# Altium PCB PCB1.PcbDoc
Units mm, origin at the board's own origin, x right, y up, seen from the top; angles counter-clockwise.
Board outline 100 x 100 mm, 2 copper layers (Top Layer, Bottom Layer); 75 components, 80 nets, 260 pads, 0 vias.
Unrouted connection lines stored in the file: 171.
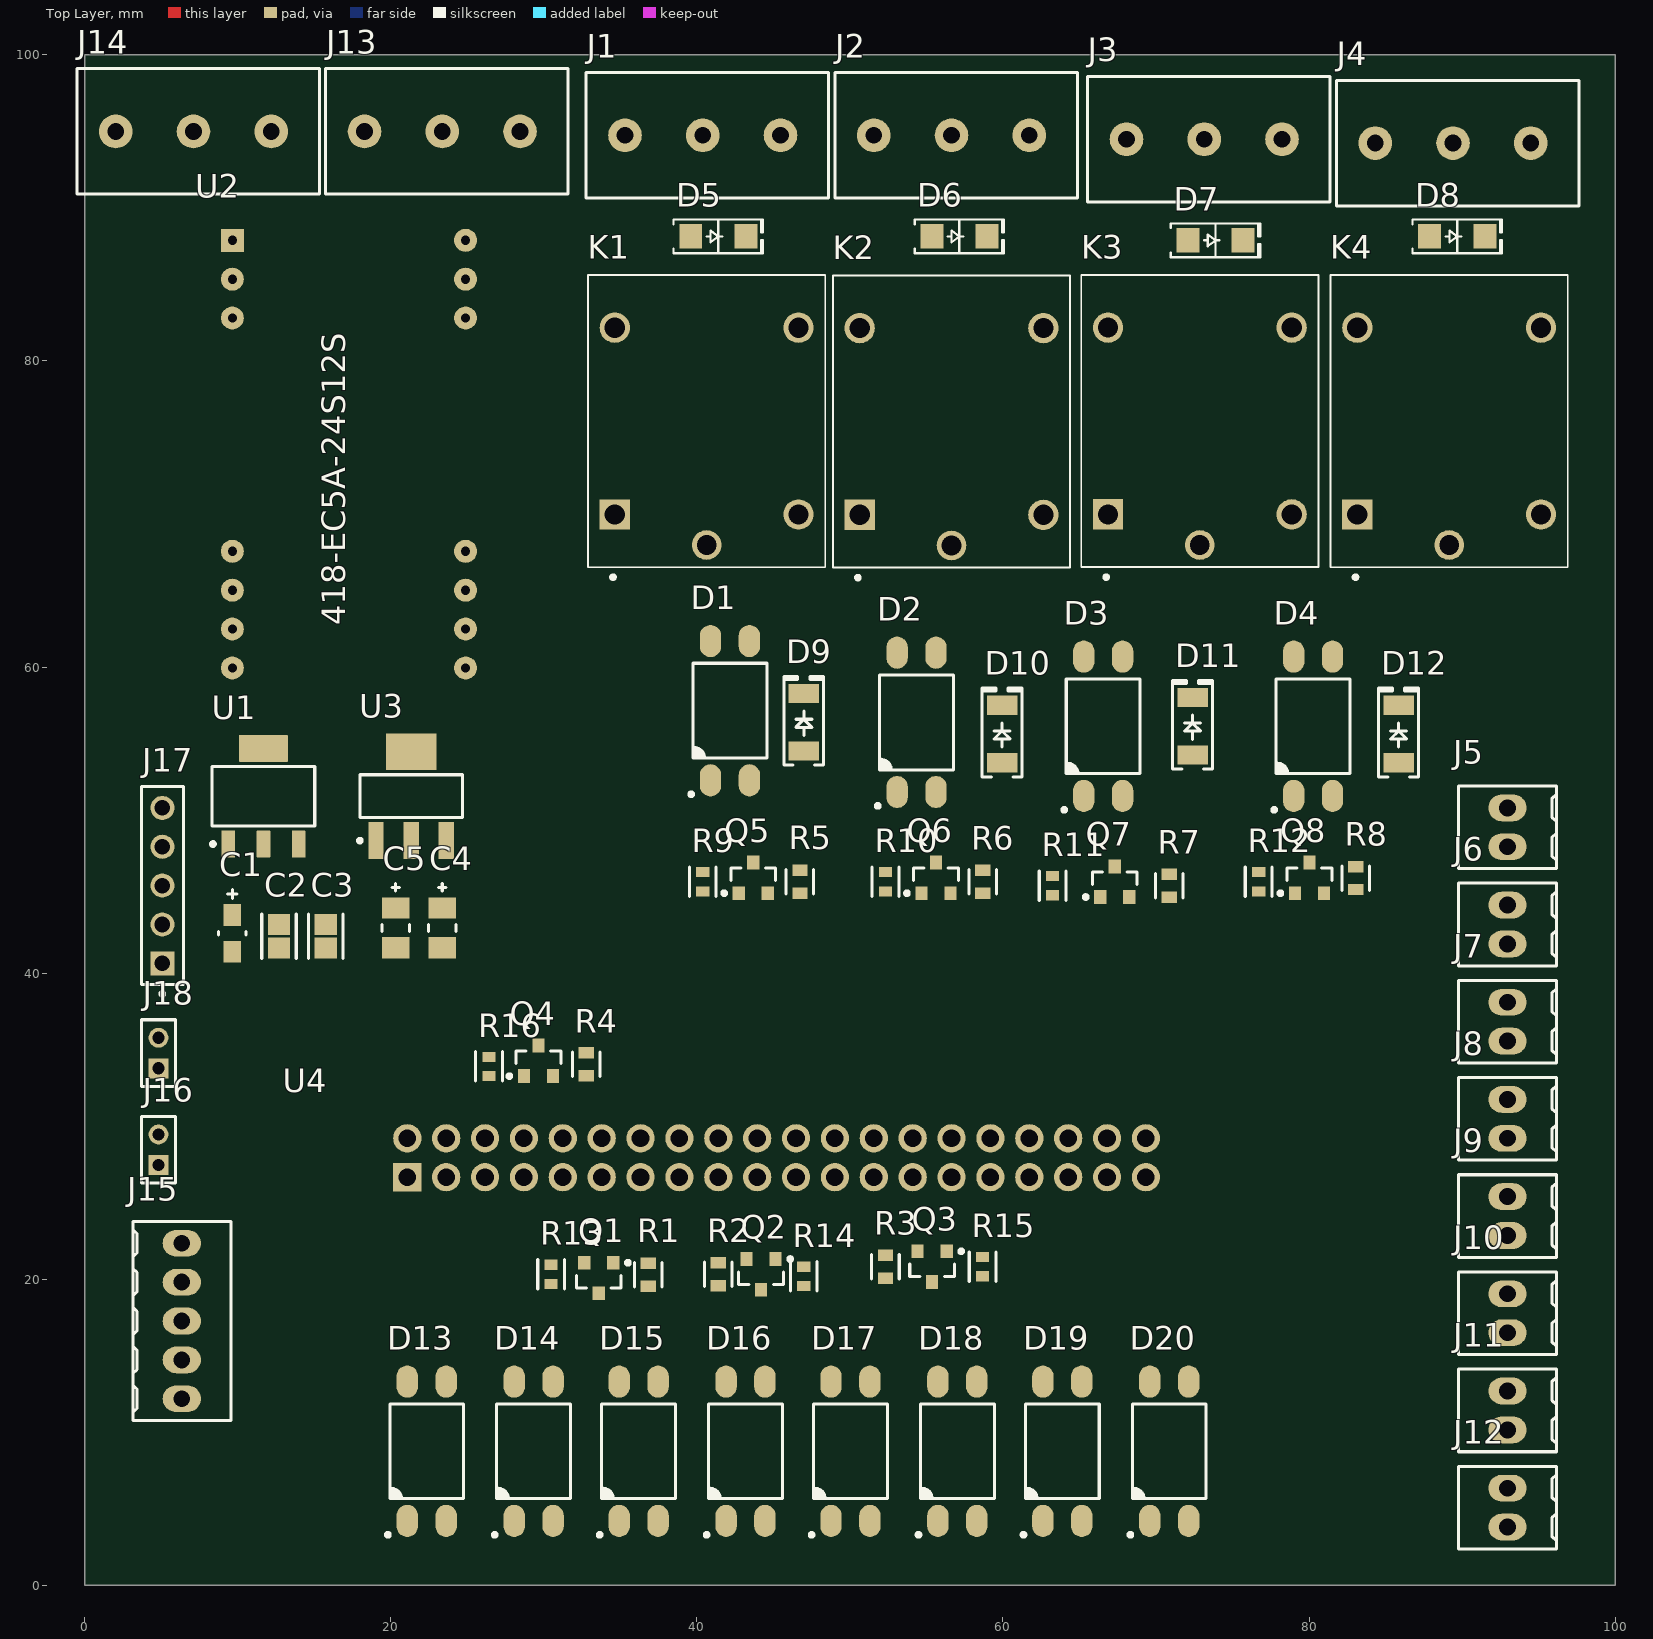
[diagram p0: Top Layer view]
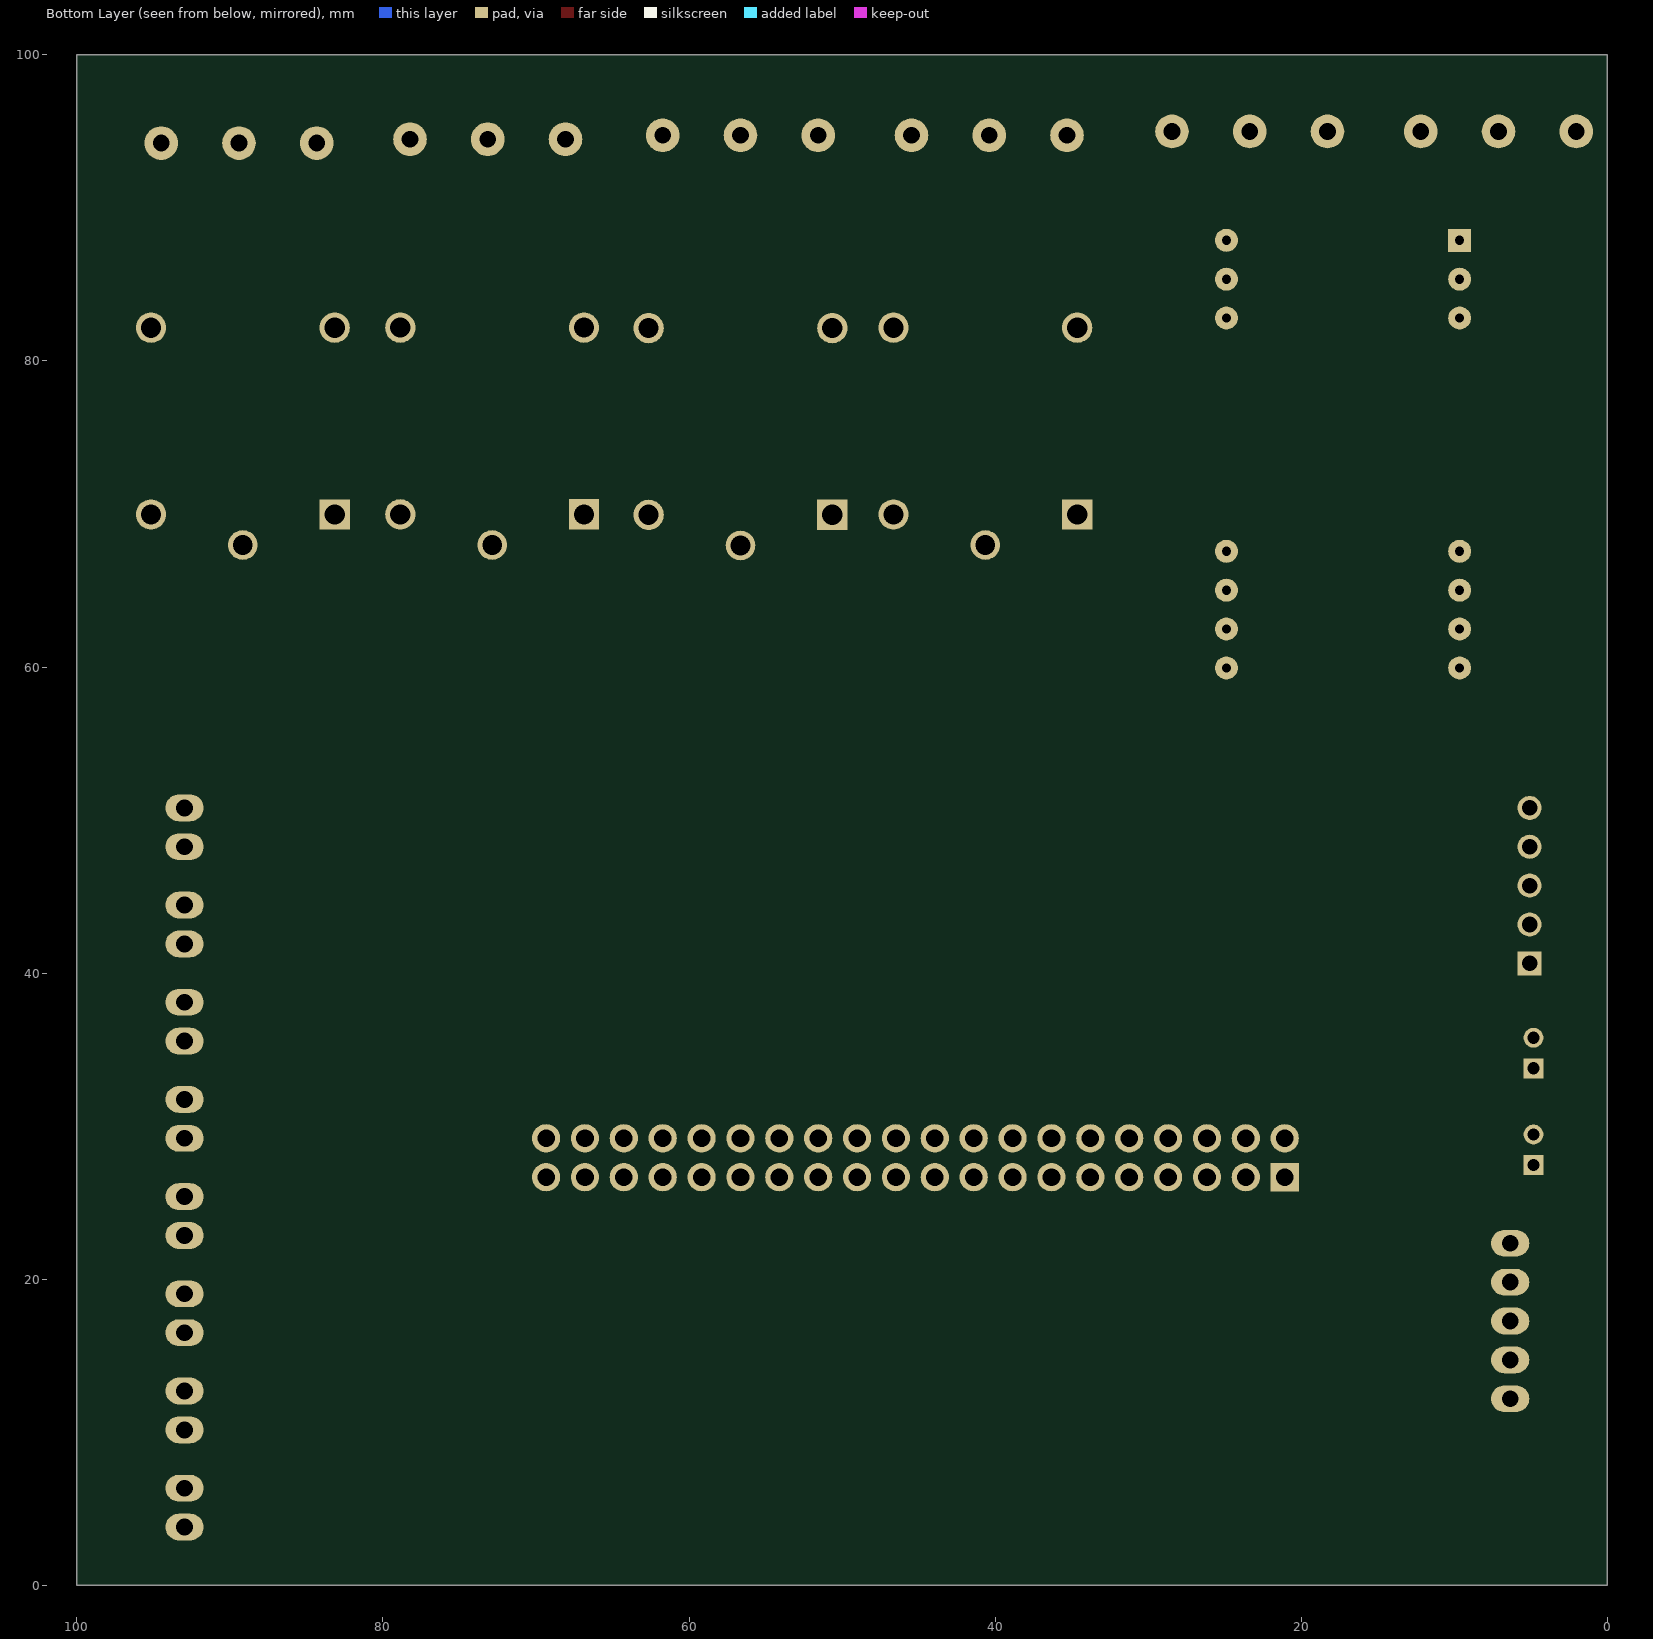
[diagram p1: Bottom Layer view, seen from below]

## Layer stack, top to bottom
Top Solder: solder mask 0.0102, Solder Resist, Dk 3.5
Top Layer: signal copper 0.0356
Dielectric 1: dielectric 0.32, FR-4, Dk 4.8
Bottom Layer: signal copper 0.0356
Bottom Solder: solder mask 0.0102, Solder Resist, Dk 3.5

## Board outline
0,0 0,100 100,100 100,0

## Design rules (kind name [scope] priority, off if disabled: settings)
Clearance [All] p1: gap=0.254 ignorepadtopadclearanceinfootprint=FALSE
PolygonConnect [All] p1: connectstyle=Relief reliefconductorwidth=0.254 reliefentries=4 polygonreliefangle="90 Angle" airgapwidth=0.254
RoutingVias [All] p1: holewidth=0.711 width=1.27 viastyle="Through Hole" minholewidth=0.711 minwidth=1.27 maxholewidth=0.711 maxwidth=1.27
SolderMaskExpansion [All] p1: expansion=0.102 istentingtop=FALSE
SupplyNets "Schematic Supply Nets_4" [InNet('3V3')] p1: voltage=0.000
SupplyNets "Schematic Supply Nets_3" [InNet('+24V')] p2: voltage=0.000
SupplyNets "Schematic Supply Nets_2" [InNet('+5V')] p3: voltage=0.000
SupplyNets "Schematic Supply Nets_1" [InNet('GND')] p4: voltage=0.000
SupplyNets "Schematic Supply Nets" [InNet('+12V')] p5: voltage=0.000
Width [All] p1: maxlimit=0.254 minlimit=0.254 preferedwidth=0.254
30 further rules are at their usual default settings.

## Components (designator, comment, footprint, x,y, rotation, side; value= is the part's Value field where it differs from the comment)
C1 "4.7uF" FP-T491A475M016AT-MFG 9.652,42.602 r90 top
C2 "10uF" FP-C2012-125-0_2-IPC_B 12.7,42.42 r270 top
C3 "10uF" FP-C2012-125-0_2-IPC_B 15.748,42.418 r90 top
C4 "10uF" FP-TAJA-MFG 23.368,42.956 r90 top
C5 "10uF" FP-TAJA-MFG 20.32,42.956 r90 top
D1 "LTV-817S-TA" "LITEON LTV-817" 42.164,57.15 r90 top
D2 "LTV-817S-TA" "LITEON LTV-817" 54.356,56.388 r90 top
D3 "LTV-817S-TA" "LITEON LTV-817" 66.548,56.134 r90 top
D4 "LTV-817S-TA" "LITEON LTV-817" 80.264,56.134 r90 top
D5 "Red" "LED 1206_3216 RED" 41.402,88.138 r0 top
D6 "Red" "LED 1206_3216 RED" 57.15,88.138 r0 top
D7 "Red" "LED 1206_3216 RED" 73.892,87.884 r0 top
D8 "Red" "LED 1206_3216 RED" 89.684,88.138 r0 top
D9 "LL4148" "SOD-80 MiniMELF" 46.99,56.388 r90 top
D10 "LL4148" "SOD-80 MiniMELF" 59.944,55.626 r90 top
D11 "LL4148" "SOD-80 MiniMELF" 72.39,56.134 r90 top
D12 "LL4148" "SOD-80 MiniMELF" 85.852,55.626 r90 top
D13 "LTV-817S-TA" "LITEON LTV-817" 22.352,8.763 r90 top
D14 "LTV-817S-TA" "LITEON LTV-817" 29.337,8.763 r90 top
D15 "LTV-817S-TA" "LITEON LTV-817" 36.195,8.763 r90 top
D16 "LTV-817S-TA" "LITEON LTV-817" 43.18,8.763 r90 top
D17 "LTV-817S-TA" "LITEON LTV-817" 50.038,8.763 r90 top
D18 "LTV-817S-TA" "LITEON LTV-817" 57.023,8.763 r90 top
D19 "LTV-817S-TA" "LITEON LTV-817" 63.881,8.763 r90 top
D20 "LTV-817S-TA" "LITEON LTV-817" 70.866,8.763 r90 top
J1 "282837-3" "TE 282837-3" 40.386,94.742 r0 top
J2 "282837-3" "TE 282837-3" 56.642,94.742 r0 top
J3 "282837-3" "TE 282837-3" 73.152,94.488 r0 top
J4 "282837-3" "TE 282837-3" 89.408,94.234 r0 top
J5 "282834-2" "TE 282834-2" 92.964,49.53 r270 top
J6 "282834-2" "TE 282834-2" 92.964,43.18 r270 top
J7 "282834-2" "TE 282834-2" 92.964,36.83 r270 top
J8 "282834-2" "TE 282834-2" 92.964,30.48 r270 top
J9 "282834-2" "TE 282834-2" 92.964,24.13 r270 top
J10 "282834-2" "TE 282834-2" 92.964,17.78 r270 top
J11 "282834-2" "TE 282834-2" 92.964,11.43 r270 top
J12 "282834-2" "TE 282834-2" 92.964,5.08 r270 top
J13 "282837-3" "TE 282837-3" 23.368,94.996 r0 top
J14 "282837-3" "TE 282837-3" 7.112,94.996 r0 top
J15 "282834-5" "TE 282834-5" 6.35,17.272 r90 top
J16 "M22-2510205" FP-M22-2510205-MFG 4.826,28.464 r90 top
J17 "22-28-4050" FP-22-28-4050-MFG 5.08,45.72 r90 top
J18 "M22-2510205" FP-M22-2510205-MFG 4.826,34.782 r90 top
K1 "SRD-12VDC-SL-C" RELAY_SRD-05VDC-SL-C 40.64,76.073 r90 top
K2 "SRD-12VDC-SL-C" RELAY_SRD-05VDC-SL-C 56.642,76.045 r90 top
K3 "SRD-12VDC-SL-C" RELAY_SRD-05VDC-SL-C 72.867,76.077 r90 top
K4 "SRD-12VDC-SL-C" RELAY_SRD-05VDC-SL-C 89.154,76.073 r90 top
Q1 "SMMBT3904LT1G" ONSC-SOT-23-3-318-08_V 33.594,20.082 r270 top
Q2 "SMMBT3904LT1G" ONSC-SOT-23-3-318-08_V 44.196,20.32 r270 top
Q3 "SMMBT3904LT1G" ONSC-SOT-23-3-318-08_V 55.372,20.828 r270 top
Q4 "SMMBT3904LT1G" ONSC-SOT-23-3-318-08_V 29.652,34.274 r90 top
Q5 "SMMBT3904LT1G" ONSC-SOT-23-3-318-08_V 43.688,46.228 r90 top
Q6 "SMMBT3904LT1G" ONSC-SOT-23-3-318-08_V 55.626,46.228 r90 top
Q7 "SMMBT3904LT1G" ONSC-SOT-23-3-318-08_V 67.31,45.974 r90 top
Q8 "SMMBT3904LT1G" ONSC-SOT-23-3-318-08_V 80.026,46.228 r90 top
R1 "820 Ohm" FP-CRCW0603-HPe3-MFG 36.83,20.308 r270 top
R2 "820 Ohm" FP-CRCW0603-HPe3-MFG 41.402,20.32 r270 top
R3 "820 Ohm" FP-CRCW0603-HPe3-MFG 52.324,20.816 r270 top
R4 "820 Ohm" FP-CRCW0603-HPe3-MFG 32.766,34.036 r90 top
R5 "820 Ohm" FP-CRCW0603-HPe3-MFG 46.736,45.986 r270 top
R6 "820 Ohm" FP-CRCW0603-HPe3-MFG 58.674,45.962 r270 top
R7 "820 Ohm" FP-CRCW0603-HPe3-MFG 70.866,45.72 r270 top
R8 "820 Ohm" FP-CRCW0603-HPe3-MFG 83.058,46.216 r270 top
R9 "1 k" FP-MCT0603-IPC_C 40.386,45.974 r270 top
R10 "1 k" FP-MCT0603-IPC_C 52.324,45.974 r270 top
R11 "1 k" FP-MCT0603-IPC_C 63.246,45.72 r270 top
R12 "1 k" FP-MCT0603-IPC_C 76.708,45.974 r270 top
R13 "1 k" FP-MCT0603-IPC_C 30.48,20.32 r90 top
R14 "1 k" FP-MCT0603-IPC_C 46.99,20.187 r90 top
R15 "1 k" FP-MCT0603-IPC_C 58.674,20.828 r90 top
R16 "1 k" FP-MCT0603-IPC_C 26.416,33.903 r270 top
U1 "TL1963A-33DCYR" DCY0004A_N 11.684,51.562 r90 top
U2 "418-EC5A-24S12S" 418-EC5A-24S12S 9.652,87.884 r0 top
U3 "LM1117MP-5.0" MP04A_N 21.336,51.562 r90 top
U4 "Raspberry pi zero 2W" PCBComponent_1 21.082,26.67 r90 top

## Footprints (in the part's own frame and the unit in brackets; to place one, negate y for a bottom-side part, rotate by r counter-clockwise, add the part's x,y. Pads: shape width x height; smd on the part's side, far side on the other; paste and mask are expansions set on the pad)
418-EC5A-24S12S [mm]
  rect 1.5x1.5 hole 0.6: 1(0,0)
  round 1.5 hole 0.6: 2(0,-2.54) 3(0,-5.08) 9(0,-20.32) 10(0,-22.86) 11(0,-25.4) 12(0,-27.94) 13(15.24,-27.94) 14(15.24,-25.4) 15(15.24,-22.86) 16(15.24,-20.32) 22(15.24,-5.08) 23(15.24,-2.54) 24(15.24,0)
  body extent -2.52,-29.87 17.78,1.93, height 10.2
DCY0004A_N [mm] "SOT223, 4-Leads, Body 6.7x3.7mm, Pitch 2.3mm, IPC Medium Density"
  rrect11% 1.75x0.9 smd: 1(-3.125,2.3) 2(-3.125,0) 3(-3.125,-2.3)
  rrect6% 1.75x3.2 smd: 4(3.125,0)
  silkscreen extent -3.25,-3.35 1.95,3.42, body extent -3.5,-3.25 3.5,3.25, height 1.62
FP-22-28-4050-MFG [mm]
  rect 1.57x1.57 hole 1.02 paste-2539.97 mask+0: 1(-5.08,0)
  round 1.57 hole 1.02 paste-2539.97 mask+0: 2(-2.54,0) 3(0,0) 4(2.54,0) 5(5.08,0)
  silkscreen extent -7.2,-1.37 6.48,1.37, body extent -6.58,-1.47 6.58,1.47, height 0.25
FP-C2012-125-0_2-IPC_B [mm]
  rect 1.378x1.456 smd paste+0 mask+0: 1(-0.764,0) 2(0.764,0)
  silkscreen extent -1.45,-1.13 1.45,1.13, body extent -1.7,-0.98 1.7,0.98, height 0.25
FP-CRCW0603-HPe3-MFG [mm]
  rect 0.75x1 smd paste+0 mask+0: 1(-0.75,0) 2(0.75,0)
  silkscreen extent -0.8,-0.9 0.8,0.9, body extent -1.22,-0.6 1.22,0.6, height 0.25
FP-M22-2510205-MFG [mm]
  rect 1.3x1.3 hole 0.8 paste-2539.97 mask+0: 1(-1,0)
  round 1.3 hole 0.8 paste-2539.97 mask+0: 2(1,0)
  silkscreen extent -2.17,-1.1 2.17,1.1, body extent -2.27,-1.2 2.27,1.2, height 0.25
FP-MCT0603-IPC_C [mm]
  rect 0.664x0.862 smd paste+0 mask+0: 1(-0.629,0) 2(0.629,0)
  silkscreen extent -0.96,-0.87 0.96,0.87, body extent -1.06,-0.58 1.06,0.58, height 0.25
FP-T491A475M016AT-MFG [mm]
  rect 1.42x1.13 smd paste+0 mask+0: 1(-1.2,0) 2(1.2,0)
  silkscreen extent -0.12,-0.9 2.88,0.9, body extent -2.03,-1.02 2.03,1.02, height 0.25
FP-TAJA-MFG [mm]
  rect 1.4x1.8 smd paste+0 mask+0: 1(-1.3,0) 2(1.3,0)
  silkscreen extent -0.23,-0.9 2.9,0.9, body extent -2.1,-1 2.1,1, height 0.25
"LED 1206_3216 RED" [mm] "Chip Diode, 2-Leads, Body 3.13x1.55mm, IPC Medium Density"
  rect 1.5x1.6 smd: 1(-1.8,0) 2(1.8,0)
  silkscreen extent -2.92,-1.1 2.92,1.1, body extent -1.6,-0.8 1.6,0.8, height 0.9
"LITEON LTV-817" [mm] "SOP, 4-Leads, Body 4.60x6.50mm, Pitch 2.54mm, IPC Medium Density"
  oval 2.1x1.4 smd: 1(-4.55,1.27) 2(-4.55,-1.27) 3(4.55,-1.27) 4(4.55,1.27)
  silkscreen extent -5.59,-2.41 3.1,2.66, body extent -5.1,-2.3 5.1,2.3, height 3.85
MP04A_N [mm] "SOT223, 4-Leads, Body 6.5x3.5mm, Pitch 2.3mm, Lead Span 7mm, IPC Medium Density"
  rect 2.4x1 smd: 1(-2.9,2.3) 2(-2.9,0) 3(-2.9,-2.3)
  rect 2.4x3.3 smd: 4(2.9,0)
  silkscreen extent -3.02,-3.35 1.4,3.47, body extent -1.86,-3.35 1.86,3.35, height 1.8
ONSC-SOT-23-3-318-08_V [mm] "SOT23, 3-Leads, Body 2.92x1.3mm, Pitch 0.95mm"
  rect 0.9x0.8 smd: 1(-1,0.95) 2(-1,-0.95) 3(1,0)
  silkscreen extent -1.12,-1.46 0.65,2.03, body extent -0.65,-1.46 0.65,1.46, height 1.11
PCBComponent_1 [mm]
  rect 1.85x1.85 hole 1.15: 1(0,0)
  round 1.85 hole 1.15: 2(2.54,0) 3(0,-2.54) 4(2.54,-2.54) 5(0,-5.08) 6(2.54,-5.08) 7(0,-7.62) 8(2.54,-7.62) 9(0,-10.16) 10(2.54,-10.16) 11(0,-12.7) 12(2.54,-12.7) 13(0,-15.24) 14(2.54,-15.24) 15(0,-17.78) 16(2.54,-17.78) 17(0,-20.32) 18(2.54,-20.32) 19(0,-22.86) 20(2.54,-22.86) 21(0,-25.4) 22(2.54,-25.4) 23(0,-27.94) 24(2.54,-27.94) 25(0,-30.48) 26(2.54,-30.48) 27(0,-33.02) 28(2.54,-33.02) 29(0,-35.56) 30(2.54,-35.56) 31(0,-38.1) 32(2.54,-38.1) 33(0,-40.64) 34(2.54,-40.64) 35(0,-43.18) 36(2.54,-43.18) 37(0,-45.72) 38(2.54,-45.72) 39(0,-48.26) 40(2.54,-48.26)
  body extent -25.82,-56.63 4.78,8.37, height 15.65
RELAY_SRD-05VDC-SL-C [mm]
  rect 1.98x1.98 / inner round 1.98 / far side rect 1.98x1.98 hole 1.32: A1(-6.1,6)
  round 1.98 hole 1.32: A2(-6.1,-6) NC(6.1,6) NO(6.1,-6)
  round 1.935 hole 1.29: COM(-8.1,0)
  silkscreen extent -10.3,-7.75 9.55,7.75, body extent -9.6,-7.8 9.6,7.8, height 15.8
"SOD-80 MiniMELF" [mm] "Molded Diode, 2-Leads, Body 3.40x1.50mm, IPC Medium Density"
  rect 1.25x2 smd: 1(-1.875,0) 2(1.875,0)
  silkscreen extent -2.8,-1.3 2.99,1.3, body extent -1.7,-0.75 1.7,0.75, height 1.5
"TE 282834-2" [mm]
  oval 1.75x2.5 hole 1.1: 1(-1.27,0) 2(1.27,0)
  silkscreen extent -2.7,-3.2 2.7,3.2, body extent -2.77,-3.25 2.77,3.25, height 10
"TE 282834-5" [mm]
  oval 1.75x2.5 hole 1.1: 1(-5.08,0) 2(-2.54,0) 3(0,0) 4(2.54,0) 5(5.08,0)
  silkscreen extent -6.51,-3.2 6.51,3.2, body extent -6.58,-3.25 6.58,3.25, height 10
"TE 282837-3" [mm] "Wire to Board Terminal Block Horizontal with Board, 3 Postions, Body 15.84x8.2mm, Pitch 5.08mm"
  round 2.2 hole 1.1: 1(-5.08,0) 2(0,0) 3(5.08,0)
  silkscreen extent -7.62,-4.1 8.22,4.1, body extent -7.62,-4.1 8.22,4.1, height 10.3

## Part data
C1: library part CMP-03017-000026-1, "T491A475M016AT CAP TANT 4.7UF 20% 16V 1206", Case Code (Imperial)=1206, Case Code (Metric)=3216, ESR (Equivalent Series Resistance)=4R, Leakage Current=800nA, Max Operating Temperature=125°C, Min Operating Temperature=-55°C, Package Quantity=2000, Ripple Current=137mA, Tolerance=20%, Voltage Rating=16V, Capacitance=4.7uF, Case/Package=1206, Construction=Flat, Depth=1.6mm, Dissipation Factor=6%, Features="General Purpose", Height=1.8mm, Height - Seated (Max)=0.071inch, Lead Free="Lead Free", Length=3.2mm, Life (Hours)=2000Hour, Mount="Surface Mount", Number of Pins=2, Packaging="Tape and Reel", Polarity=Polar, Radiation Hardening=No, REACH SVHC="No SVHC", RoHS Compliant=Yes, Series=T491, Termination=SMD/SMT, Voltage Rating (DC)=16V, Width=0.063inch
C2 C3: library part CMP-08246-002675-1, "C2012X5R1E106K125AB Multilayer Ceramic Capacitors 10μF ±10% 25V X5R SMD 0805", Case Code (Imperial)=0805, Case Code (Metric)=2012, Dielectric=X5R, Dielectric Material=Ceramic, Max Operating Temperature=85°C, Min Operating Temperature=-55°C, Package Quantity=1, Tolerance=10%, Voltage=25V, Capacitance=10uF, Case/Package=0805, Depth=1.25mm, Height=1.25mm, Lead Free="Lead Free", Length=2mm, Mount="Surface Mount", Packaging="Tape and Reel", REACH SVHC="No SVHC", Resistor Type=Ceramic, Series=C, Termination=SMD/SMT, Thickness=0.057inch, Voltage Rating=25V, Voltage Rating (DC)=25V, Weight=0.000194oz, Width=0.049inch
C4 C5: library part CMP-2000-07219-2, "TAJA106M010RNJ 10uF 10V  ±20% 3Ω 1206  SMD Tantalum Capacitor", Case Code (Imperial)=1206, Case Code (Metric)=3216, Dielectric Material=Tantalum, ESR (Equivalent Series Resistance)=3R, Leakage Current=1uA, Max Operating Temperature=125°C, Min Operating Temperature=-55°C, Package Quantity=1, Tolerance=20%, Voltage=10V, Capacitance=10uF, Case/Package=1206, Construction=Flat, Depth=1.6mm, Dissipation Factor=6%, Features="General Purpose", Height=1.6mm, Height - Seated (Max)=0.071inch, Lead Free="Lead Free", Lead Pitch=1.1mm, Length=3.2mm, Mount="Surface Mount", Number of Pins=2, Packaging="Tape and Reel", Polarity=Polar, Radiation Hardening=No, REACH SVHC="No SVHC", RoHS Compliant=Yes, Series=TAJ, Termination=SMD/SMT, Voltage Rating=10V, Voltage Rating (DC)=10V, Width=0.063inch
D1 D2 D3 D4 D13 D14 D15 D16 D17 D18 D19 D20: "OPTOISOLATR 5KV TRANSISTOR 4-SMD", Current - DC Forward (If) (Max)=50mA, Current Transfer Ratio (Max)="600% @ 5mA", Current Transfer Ratio (Min)="50% @ 5mA", Device Package="4-SMD, Gull Wing", Manufacturer="Lite-On Inc.", Operating Temperature="-30°C ~ 110°C", Supplier Device Package=4-SMD, Supplier Part Number 1=160-2038-1-ND, Voltage - Forward (Vf) (Typ)=1.2V, Voltage - Isolation=5000Vrms, Voltage - Output (Max)=35V, ComponentLink1Description=Datasheet, ComponentLink1URL=http://optoelectronics.liteon.com/upload/download/DS-70-96-0016/LTV-8X7%20series%20201610%20.pdf, ComponentLink2Description="DigiKey Link", ComponentLink2URL=http://digikey.com/product-detail/en/lite-on-inc/LTV-817S-TA/160-2038-1-ND/3711420, Current - Output / Channel=50mA, Input Type=DC, LastUpdated="12/01/2020 21:59:02", Lifecycle Status=Active, Minimum Order=1, Mounting Type="Surface Mount", Number of Channels=1, Output Type=Transistor, Package / Case="4-SMD, Gull Wing", Packaging=TapeAndReel, Part Number=LTV-817S-TA, Part Status=Active, Price=0.12, Rise / Fall Time (Typ)="4µs, 3µs", Series=-, Supplier 1=DigiKey, Vce Saturation (Max)=200mV
D5 D6 D7 D8: library part LTST-C150KAKT, "LED RED CLEAR SMD", Current - Test=20mA, Device Package="1206 (3216 Metric)", Lens Color=Colorless, Manufacturer="Lite-On Inc.", Millicandela Rating=55mcd, Supplier Part Number 1=160-1402-1-ND, Voltage - Forward (Vf) (Typ)=2V, Color=Red, ComponentLink1Description=Datasheet, ComponentLink1URL=//media.digikey.com/pdf/Data%20Sheets/Lite-On%20PDFs/LTST-C150KAKT.pdf, ComponentLink2Description="DigiKey Link", ComponentLink2URL=http://digikey.com/product-detail/en/lite-on-inc/LTST-C150KAKT/160-1402-1-ND/386755, Configuration=Standard, Height (Max)=1.10mm, LastUpdated="03/06/2024 20:00:41", Lens Size="2.06mm x 1.60mm", Lens Style="Rectangle with Flat Top", Lens Transparency=Clear, Lifecycle Status=Active, Minimum Order=1, Mounting Type="Surface Mount", Package / Case="1206 (3216 Metric)", Packaging=TapeAndReel, Part Number=LTST-C150KAKT, Part Status=Active, PartId=189, Price=0.07, Series=-, Size / Dimension="3.20mm L x 1.60mm W", Supplier 1=DigiKey, Viewing Angle=130°, Wavelength - Dominant=615nm, Wavelength - Peak=621nm
D9 D10 D11 D12: "DIODE GEN PURP 100V 200MA SOD80", Current - Average Rectified (Io)=200mA, Current - Reverse Leakage @ Vr="25nA @ 20V", Manufacturer="ON Semiconductor", Operating Temperature - Junction="-55°C ~ 175°C", Package / Case="DO-213AC, MINI-MELF, SOD-80", Supplier Device Package=SOD-80, Supplier Part Number 1=LL4148FSCT-ND, Voltage - DC Reverse (Vr) (Max)=100V, Voltage - Forward (Vf) (Max) @ If="1V @ 10mA", ComponentLink1Description=Datasheet, ComponentLink1URL=https://www.onsemi.com/pub/Collateral/LL4148-D.pdf, ComponentLink2Description="DigiKey Link", ComponentLink2URL=http://digikey.com/product-detail/en/on-semiconductor/LL4148/LL4148FSCT-ND/1923118, Diode Type=Standard, LastUpdated="03/06/2024 20:05:39", Lifecycle Status=Active, Minimum Order=1, Mounting Type="Surface Mount", Packaging=TapeAndReel, Part Number=LL4148, Part Status=Active, PartId=2621, Price=0.02, Reverse Recovery Time (trr)=4ns, Series=-, Speed="Small Signal =< 200mA (Io), Any Speed", Supplier 1=DigiKey
J1 J2 J3 J4 J13 J14: "TERM BLK 3P SIDE ENT 5.08MM PCB", Color=Green, Current="13.5 A", Manufacturer="TE Connectivity AMP Connectors", Supplier Part Number 1=A113321-ND, Voltage="300 V", ComponentLink1Description=Datasheet, ComponentLink1URL=https://www.te.com/commerce/DocumentDelivery/DDEController?Action=srchrtrv&DocNm=282837&DocType=Customer+Drawing&DocLang=English, ComponentLink2Description="DigiKey Link", ComponentLink2URL=https://www.digikey.com/en/products/detail/te-connectivity-amp-connectors/282837-3/2187974, Features="Interlocking (Side)", LastUpdated="21/06/2022 15:00:39", Lifecycle Status=Active, Mating Orientation="Horizontal with Board", Minimum Order=1, Mounting Type="Through Hole", Number of Levels=1, Packaging=Tray, Part Number=282837-3, Part Status=Active, Pitch="0.200\" (5.08mm)", Positions Per Level=3, Price=0.47, Series=Buchanan, Supplier 1=DigiKey, Wire Gauge="16-28 AWG", Wire Termination="Screw - Rising Cage Clamp"
J5 J6 J7 J8 J9 J10 J11 J12: "TERM BLK 2P SIDE ENT 2.54MM PCB", Color=Green, Current=10A, Manufacturer="TE Connectivity AMP Connectors", Supplier Part Number 1=A98333-ND, Voltage=150V, ComponentLink1Description=Datasheet, ComponentLink1URL=https://www.te.com/commerce/DocumentDelivery/DDEController?Action=srchrtrv&DocNm=282834&DocType=Customer+Drawing&DocLang=English, ComponentLink2Description="DigiKey Link", ComponentLink2URL=http://digikey.com/product-detail/en/te-connectivity-amp-connectors/282834-2/A98333-ND/1150135, LastUpdated="15/01/2020 4:15:38", Lifecycle Status=Active, Mating Orientation="Horizontal with Board", Minimum Order=1, Mounting Type="Through Hole", Number of Levels=1, Packaging=Bulk, Part Number=282834-2, Part Status=Active, Pitch="0.100\" (2.54mm)", Positions Per Level=2, Price=0.88, Series=Buchanan, Supplier 1=DigiKey, Wire Gauge="16-30 AWG", Wire Termination="Screw - Rising Cage Clamp"
J15: "TERM BLK 5P SIDE ENT 2.54MM PCB", Color=Green, Current=10A, Manufacturer="TE Connectivity AMP Connectors", Supplier Part Number 1=A98336-ND, Voltage=150V, ComponentLink1Description=Datasheet, ComponentLink1URL=https://www.te.com/commerce/DocumentDelivery/DDEController?Action=srchrtrv&DocNm=282834&DocType=Customer+Drawing&DocLang=English, ComponentLink2Description="DigiKey Link", ComponentLink2URL=http://digikey.com/product-detail/en/te-connectivity-amp-connectors/282834-5/A98336-ND/1153266, LastUpdated="15/01/2020 4:16:19", Lifecycle Status=Active, Mating Orientation="Horizontal with Board", Minimum Order=1, Mounting Type="Through Hole", Number of Levels=1, Packaging=Bulk, Part Number=282834-5, Part Status=Active, Pitch="0.100\" (2.54mm)", Positions Per Level=5, Price=2.99, Series=Buchanan, Supplier 1=DigiKey, Wire Gauge="16-30 AWG", Wire Termination="Screw - Rising Cage Clamp"
J16 J18: library part CMP-15831-000005-1, "CONN HEADER VERT 2POS 2MM", Current Rating=2A, Manufacturer=Harwin, Package=0, Temperature="-40°C to +105°C", Temperature Range High=+105°C, Temperature Range Low=-40°C, Automotive=No, Category=Conn, ComponentLink2Description=Datasheet, ComponentLink2URL=https://cdn.harwin.com/pdfs/C018XX_M22_Series_Connectors.pdf, Conn Gender=Male, Conn Orientation=Vertical, Contact Material=Gold,Nickel, Device Class L1=Connectors, Device Class L2="Headers and Wire Housings", Device Class L3=unset, Digikey Description="CONN HEADER VERT 2POS 2MM", Footprint Url=https://cdn.harwin.com/pdfs/M22-251.pdf, Height=5.45mm, Lead Free=Yes, Manufacturer Part Number=M22-2510205, Mouser Description="Headers & Wire Housings 2 PIN SIL VERTICAL GOLD PIN HEADER", Number Of Contacts=2, Number Of Rows=1, Octopart=https://octopart.com/m22-2510205-harwin-2538221, Pitch=2mm, RoHS=TRUE
J17: library part CMP-00257-00278173-1, "22-28-4050 KK® 254 Breakaway Header, Vertical, 5 Circuits, Tin (Sn) Plating, Mating Pin Length 6.09mm", Color=Black, Contact Resistance=20mΩ, Current Rating=4A, Flammability Rating="UL94 V-0", Max Operating Temperature=75°C, Max Voltage Rating (DC)=250.25kV, Min Operating Temperature=0°C, Voltage Rating=250V, Connector Type="Male Pin", Contact Material=Brass, Contact Mating Length=6.096mm, Contact Plating=Tin, Gender=Male, Glow Wire Compliant=Non-compliant, Height=2.29mm, Housing Color=Black, Housing Material=Thermoplastic, Lead Free="Lead Free", Lead Pitch=2.54mm, Length=12.7mm, Mount="Through Hole", NexarPartId=278173, Number of Circuits=5, Number Of Contacts=5, Number of Positions=5, Number Of Rows=1, Orientation=Vertical, Packaging=Bulk, Pitch=2.54mm, Radiation Hardening=No, REACH SVHC=Unknown, RoHS=Compliant, Schedule B=8536694040, Termination=Solder, Voltage Rating (DC)=250V, Width=2.49mm
K1 K2 K3 K4: library part SRD-05VDC-SL-C, "5V Trigger Relay Module For Arduino And Raspberry Pi 5V Trigger Relay Module For Arduino And Raspberry Pi", Package="NON STANDARD-5 Songle Relay", Availability="Not in stock", Check_prices=https://www.snapeda.com/parts/SRD-05VDC-SL-C/Songle+Relay/view-part/?ref=eda, MF="Songle Relay", MP=SRD-05VDC-SL-C, Price=None, SnapEDA_Link=https://www.snapeda.com/parts/SRD-05VDC-SL-C/Songle+Relay/view-part/?ref=snap
Q1 Q2 Q3 Q4 Q5 Q6 Q7 Q8: library part CMP-1048-00625-1, "General Purpose Transistor, NPN Silicon, 3-Pin SOT-23, Pb-Free, Tape and Reel", Manufacturer="On Semiconductor", ComponentLink1Description="Manufacturer URL", ComponentLink1URL=http://www.onsemi.com/, ComponentLink2Description=Datasheet, ComponentLink2URL=http://www.onsemi.cn/pub_link/Collateral/MMBT3904LT1-D.PDF, ComponentLink3Description="Package Specification", ComponentLink3URL=http://www.onsemi.cn/pub_link/Collateral/318-08.PDF, DatasheetVersion="Rev. 12", fT Min (MHz)=300, IC Continuous (A)=0.2, Mounting Technology="Surface Mount", PackageDescription="3-Pin Small Outline Transistor, Body 2.92 x 1.3 mm, Pitch 0.95 mm", PackageReference=SOT-23-3-318-08, PackageVersion="Rev. AP, 11/2009", Packing="Tape and Reel", PartNumber=SMMBT3904LT1G, Polarity=NPN, RoHS=TRUE
R1 R2 R3 R4 R5 R6 R7 R8: library part CMP-02407-003128-1, "RES Thick Film, 820Ω, 1%, 0.33W, 100ppm/°C, 0603", Case Code (Imperial)=0603, Case Code (Metric)=1608, Max Operating Temperature=155°C, Max Power Dissipation=250mW, Min Operating Temperature=-55°C, Package Quantity=1, Resistance=820R, Temperature Coefficient=100ppm/°C, Tolerance=1%, Voltage Rating=75V, Case/Package=0603, Composition="Thick Film", Contact Plating=Tin, Depth=0.85mm, Features="Automotive AEC-Q200", Height=0.45mm, Lead Free="Lead Free", Length=1.6mm, Military Standard=Not, Number of Terminations=2, Packaging="Tape and Reel", Power Rating=250mW, Radiation Hardening=No, Termination=SMD/SMT, Voltage Rating (DC)=75V, Weight=7.1E-05oz, Width=0.033inch
R9 R10 R11 R12 R13 R14 R15 R16: library part CMP-02407-000265-1, "MCT0603PD1001DP500 RES SMD 100 OHM 1% 1/8W 0603", Case Code (Imperial)=0603, Case Code (Metric)=1608, Max Operating Temperature=175°C, Max Power Dissipation=250mW, Min Operating Temperature=-55°C, Resistance=1kR, Temperature Coefficient=25ppm/°C, Tolerance=0.5%, Case/Package=0603, Composition="Thin Film", Features="Automotive AEC-Q200", Number of Terminations=2, Packaging="Tape and Reel"
U1: library part CMP-0395-00535-2, "Single Output Low Noise LDO, 1.5 A, Fixed 3.3 V Output, 2.1 to 20 V Input, 4-pin SOT-223 (DCY), -40 to 125 degC, Green (RoHS & no Sb/Br)", Manufacturer="Texas Instruments", Accuracy(%)=3, Code_JEDEC=TO-261, ComponentLink1Description="Manufacturer URL", ComponentLink1URL=http://www.ti.com/, ComponentLink2Description=Datasheet, ComponentLink2URL=http://www.ti.com/general/docs/lit/getliterature.tsp?genericPartNumber=TL1963A-33&fileType=pdf, ComponentLink3Description="Package Specification", ComponentLink3URL=http://www.ti.com/litv/pdf/mpds094a, DatasheetVersion=SLVS719F, Eco-Plan="Green (RoHS & no Sb/Br)", Fixed Output Options(V)=3.3, Iout(Max)(A)=1.5, Iq(Typ)(mA)=1, Mounting Technology="Surface Mount", PackageDescription="4-Pin Plastic Small Outline, Body 3.5 x 6.5 mm, Pitch 2.3 mm", PackageReference=DCY0004A, PackageVersion=4202506/B, PartNumber=TL1963A-33DCYR, SubFamily="Single Channel LDO", Vdo(Typ)(mV)=340, Vin(Max)(V)=20, Vin(Min)(V)=2.1, Vout Adj(Max)(V)=3.3, Vout Adj(Min)(V)=3.3
U3: library part CMP-0062-01640-3, "800mA Low-Dropout Linear Regulator, 4-pin SOT-223", Manufacturer="National Semiconductor", PackageTopMarking=XYTT*N06A, PowerWise=N, Code_IPC=SOT223-4, Code_JEDEC=TO-261-AA, ComponentLink1Description="Manufacturer URL", ComponentLink1URL=http://www.national.com/, ComponentLink2Description="LM1117 Datasheet", ComponentLink2URL=http://www.national.com/ds/LM/LM1117.pdf, ComponentLink3Description="LM1117 Web Page", ComponentLink3URL=http://www.national.com/pf/LM/LM1117.html, ComponentLink4Description="MP04A Package Page", ComponentLink4URL=http://www.national.com/packaging/folders/mp04a.html, CompType="LDO IC", DatasheetVersion=Apr-2006, High-Reliability=Y, PackageDescription="Molded SOT-223, 6.50 x 3.56 x 1.6mm Body, 4 Lead, 2.3mm Pitch", PackageReference=MP04A, PackageVersion="revB, Apr-2003", PartNumber=LM1117MP-5.0, PinCount=4, RevisionNote="SCH symbol layout adjusted", RoHS=N

## Nets (pads, with @x,y where several pads share a name; then routed paths per layer and width w, separated by ;. In a path a pad name is that pad's centre, name@x,y a point inside that pad or via, vN(x,y) a via of type N, cw(c..) or ccw(c..) an arc to the next point about the centre after c; other vN are vias at no path point)
3V3: C3.1 D13.4 D14.4 D15.4 D16.4 D17.4 D18.4 D19.4 D20.4 U1.3 U4.1 U4.17
5V: U4.2 U4.4
+5V: C5.2 U3.2
+12V: C1.2 C2.1 C4.2 D1.1 D1.4 D2.1 D2.4 D3.1 D3.4 D4.1 D4.4 D5.1 D6.1 D7.1 D8.1 D9.2 D10.2 D11.2 D12.2 K1.A1 K2.A1 K3.A1 K4.A1 U1.1 U2.11 U2.14 U3.3
+24V: J13.1 J13.2 J13.3 U2.22 U2.23
CE0: J17.4 U4.24
CE1: J17.5 U4.26
COM1: J1.2 K1.COM
COM2: J2.2 K2.COM
COM3: J3.2 K3.COM
COM4: J4.2 K4.COM
DI1: J15.1 U4.40
DI2: J15.2 U4.12
DI3: J15.3 U4.35
DI4: J15.4 U4.32
DI5: J15.5 U4.33
GND: C1.1 C2.2 C3.2 C4.1 C5.1 D13.2 D14.2 D15.2 D16.2 D17.2 D18.2 D19.2 D20.2 J5.2 J6.2 J7.2 J8.2 J9.2 J10.2 J11.2 J12.2 J14.1 J14.2 J14.3 Q1.2 Q2.2 Q3.2 Q4.2 Q5.2 Q6.2 Q7.2 Q8.2 U1.2 U1.4 U2.2 U2.3 U2.9 U2.16 U3.1 U4.6 U4.9 U4.14 U4.20 U4.25 U4.30 U4.34 U4.39
IN1: D13.1 J5.1
IN2: D14.1 J6.1
IN3: D15.1 J7.1
IN4: D16.1 J8.1
IN5: D17.1 J9.1
IN6: D18.1 J10.1
IN7: D19.1 J11.1
IN8: D20.1 J12.1
MISO: J17.2 U4.21
MOSI: J17.1 U4.19
NC1: J1.1 K1.NC
NC2: J2.1 K2.NC
NC3: J3.1 K3.NC
NC4: J4.1 K4.NC
NetD1_2: D1.2 R1.1
NetD1_3: D1.3 R9.1
NetD2_2: D2.2 R2.1
NetD2_3: D2.3 R10.1
NetD3_2: D3.2 R3.1
NetD3_3: D3.3 R11.1
NetD4_2: D4.2 R4.1
NetD4_3: D4.3 R12.1
NetD5_2: D5.2 R5.2
NetD6_2: D6.2 R6.2
NetD7_2: D7.2 R7.2
NetD8_2: D8.2 R8.2
NetD9_1: D9.1 K1.A2 Q5.3 R5.1
NetD10_1: D10.1 K2.A2 Q6.3 R6.1
NetD11_1: D11.1 K3.A2 Q7.3 R7.1
NetD12_1: D12.1 K4.A2 Q8.3 R8.1
NetQ1_1: Q1.1 R13.2
NetQ1_3: Q1.3 R1.2
NetQ2_1: Q2.1 R14.2
NetQ2_3: Q2.3 R2.2
NetQ3_1: Q3.1 R15.2
NetQ3_3: Q3.3 R3.2
NetQ4_1: Q4.1 R16.2
NetQ4_3: Q4.3 R4.2
NetQ5_1: Q5.1 R9.2
NetQ6_1: Q6.1 R10.2
NetQ7_1: Q7.1 R11.2
NetQ8_1: Q8.1 R12.2
NO1: J1.3 K1.NO
NO2: J2.3 K2.NO
NO3: J3.3 K3.NO
NO4: J4.3 K4.NO
OI1: D13.3 U4.18
OI2: D14.3 U4.22
OI3: D15.3 U4.7
OI4: D16.3 U4.29
OI5: D17.3 U4.31
OI6: D18.3 U4.36
OI7: D19.3 U4.11
OI8: D20.3 U4.38
Rele1: R13.1 U4.13
Rele2: R14.1 U4.15
Rele3: R15.1 U4.37
Rele4: R16.1 U4.16
RXD: J18.1 U4.10
SCL: J16.2 U4.5
SCLK: J17.3 U4.23
SDA: J16.1 U4.3
TXD: J18.2 U4.8
pads on no net: U2.1 U2.10 U2.12 U2.13 U2.15 U2.24 U3.4 U4.27 U4.28

## Silkscreen, mask and mechanical layers (free items; w line width, h text height)
Mechanical 1:
  the board outline again, w0.254